# EAGLE board LightStripCircuitFinal (EAGLE 7.5.0)
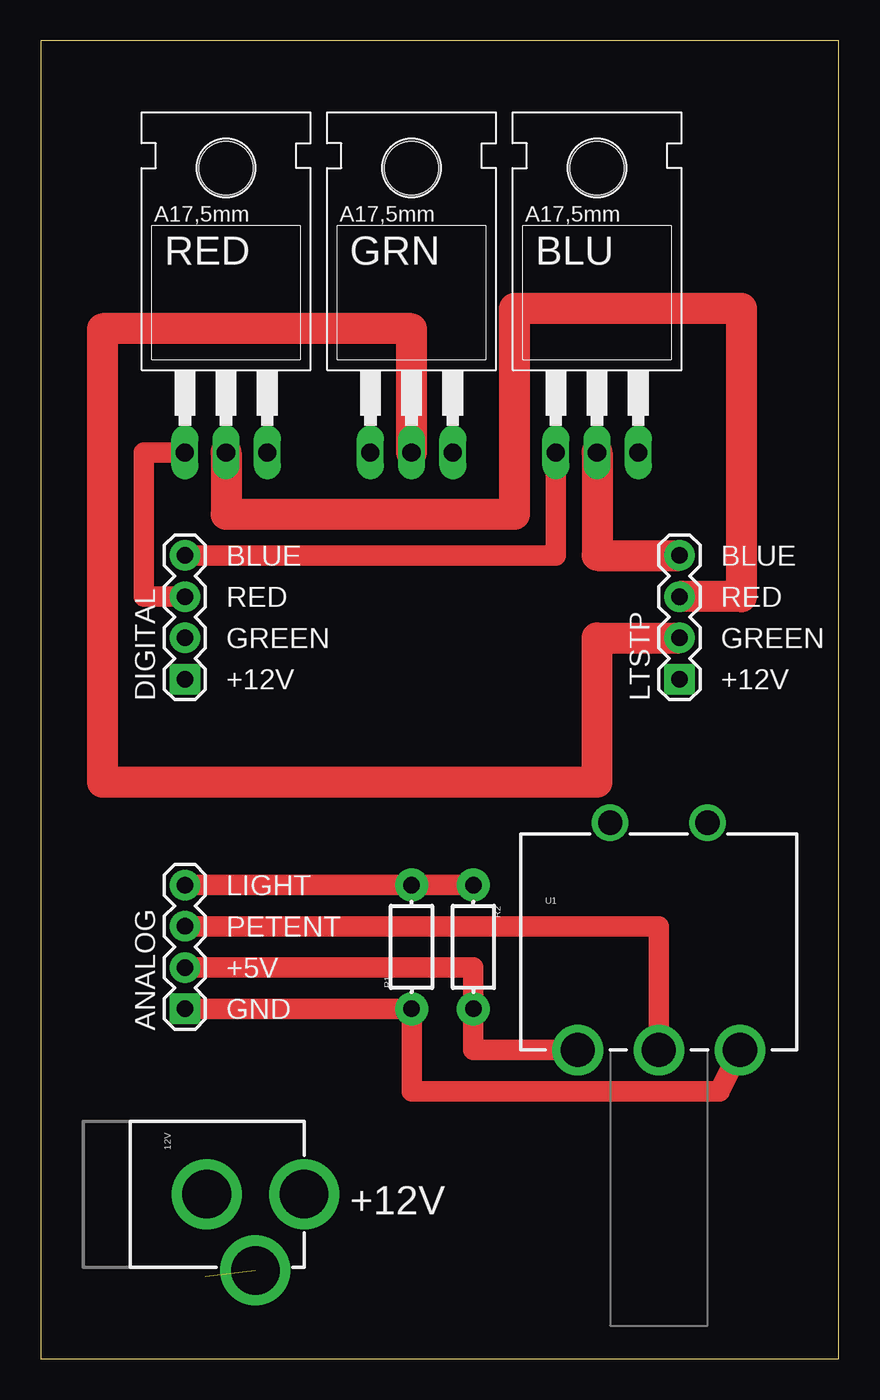
[diagram p0: board, top side]
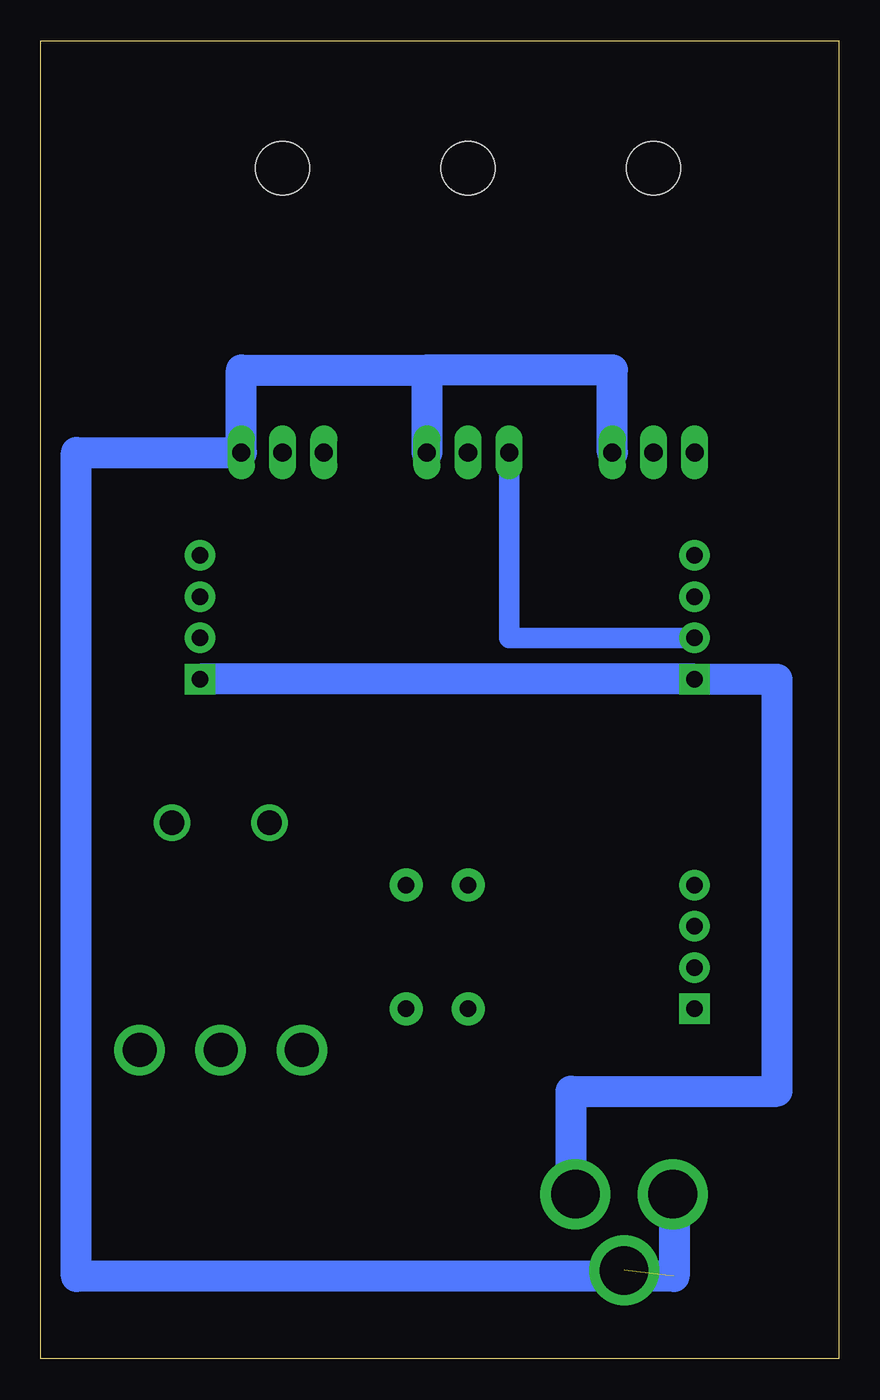
[diagram p1: board, bottom side, seen from below]

Size 49.2 x 81.27 mm. Coordinates in mm from the lower left corner, seen from the top.
Outline: 0,0 49.2,0 49.2,81.27 0,81.27 0,0
Copper layers (1*16): Top 0.035mm / dielectric 1.5mm / Bottom 0.035mm
Design rules "default": minimum track width 10mil, minimum drill 24mil, track to track 8mil, track to pad 8mil, pad to pad 8mil, via to via 8mil, smd to smd 8mil, copper to edge 40mil, drill to drill 8mil, minimum pad ring 10mil, minimum via ring 8mil, stop-mask expansion 4mil, vias tented up to drill 0mil, thermal gap 10mil

## Footprints (pad centres in the part's own frame; a part is rotated, then mirrored left to right if it is on the bottom)
POWER_JACK_PTH = drill 2.997 pad 4.318: GND 0,7.7; GNDBREAK 4.7,10.7; PWR 0,13.7
1X04 = drill 1.016 pad 1.88 square: 1 0,0 | drill 1.016 pad 1.88: 2 2.54,0; 3 5.08,0; 4 7.62,0
TO220 = drill 1.118 long: 1 -2.54,-6.35; 2 0,-6.35; 3 2.54,-6.35 | hole 3.302: 0,11.176
AXIAL-0.3-KIT = drill 1.016 pad 2.032: P$1 -3.81,0; P$2 3.81,0
POT_PTH = drill 2.1: E@1 -5,0; E@2 5,0; WAND 0,0 | drill 1.5: S1 -3,14; S2 3,14

## Placement (x,y rotation side)
12V  POWER_JACKPTH  [POWER_JACK_PTH]  2.54,10.16 270 top
ANALOG  [1X04]  8.89,21.59 90 top
BLU  BLU  [TO220]  34.29,62.23 0 top
DIGITAL  [1X04]  8.89,41.91 90 top
GRN  GRN  [TO220]  22.86,62.23 0 top
LTSTP  [1X04]  39.37,41.91 90 top
R1  [AXIAL-0.3-KIT]  22.86,25.4 90 top
R2  [AXIAL-0.3-KIT]  26.67,25.4 270 top
RED  RED  [TO220]  11.43,62.23 0 top
U1  [POT_PTH]  38.1,19.05 0 top

## Library data of the parts
12V = SparkFun-Connectors; PROD_ID: CONN-08197
ANALOG DIGITAL LTSTP = SparkFun-Connectors
BLU GRN RED = transistor-fet
R1 R2 = SparkFun-Passives
U1 = SparkFun-Electromechanical

## Nets
N$1: GRN.2 LTSTP.2
N$2: LTSTP.3 RED.2
N$3: 12V.GND 12V.GNDBREAK BLU.3 GRN.3 RED.3
N$4: 12V.PWR DIGITAL.1 LTSTP.1
N$5: BLU.2 LTSTP.4
N$6: ANALOG.4 R1.P$2 R2.P$1
N$7: ANALOG.2 R2.P$2 U1.E@1
N$8: ANALOG.3 U1.WAND
N$9: ANALOG.1 R1.P$1 U1.E@2
N$10: DIGITAL.2 GRN.1
N$11: DIGITAL.3 RED.1
N$12: BLU.1 DIGITAL.4

## Tracks (layer width: path | path; a pad name or v marks a point on that pad's centre or on a via)
N$1
  Top 1.905: GRN.2 22.86,63.5 3.81,63.5 3.81,35.56 34.29,35.56 34.29,44.45 LTSTP.2
N$2
  Top 1.905: RED.2 11.43,52.07 29.21,52.07 29.21,64.77 43.18,64.77 43.18,46.99 LTSTP.3
N$3  (1 unrouted)
  Bottom 1.905: RED.3 13.97,60.96 25.4,60.96 | 25.4,60.96 GRN.3 | 25.4,60.96 36.83,60.96 BLU.3 46.99,55.88 46.99,5.08 10.16,5.08 10.16,10.16 12V.GND
N$4
  Bottom 1.27: 12V.PWR 16.51,10.16
  Bottom 1.905: 16.51,10.16 16.51,16.51 3.81,16.51 3.81,41.91 DIGITAL.1 LTSTP.1
N$5
  Top 1.905: BLU.2 34.29,49.53 LTSTP.4
N$6
  Top 1.27: ANALOG.4 R1.P$2 R2.P$1
N$7
  Top 1.27: ANALOG.2 20.32,24.13 21.59,24.13 26.67,24.13 R2.P$2 26.67,19.05 U1.E@1
N$8
  Top 1.27: ANALOG.3 38.1,26.67 U1.WAND
N$9
  Top 1.27: ANALOG.1 R1.P$1 22.86,16.51 41.85,16.51 41.85,16.54 | 41.83,16.51 41.85,16.54 | 41.85,16.54 U1.E@2
N$10
  Bottom 1.27: GRN.1 20.32,44.45 | 20.32,44.45 DIGITAL.2 | 20.32,44.45 DIGITAL.2 | 20.32,44.45 DIGITAL.2 | 20.32,44.45 DIGITAL.2
N$11
  Top 1.27: RED.1 6.35,55.88 6.35,46.99 DIGITAL.3
N$12
  Top 1.27: BLU.1 31.75,49.53 DIGITAL.4

## Text on the board
tNames: BLUE | BLUE | RED | RED | GREEN | GREEN | +12V | +12V | LIGHT | PETENT | +5V | GND | +12V